# Altium PCB 00.main.PcbDoc (part 2 of 2)
Units mm, origin at the board's own origin, x right, y up, seen from the top; angles counter-clockwise.
Board outline 186 x 60 mm, 2 copper layers (Top Layer, Bottom Layer); 117 components, 80 nets, 547 pads, 161 vias.
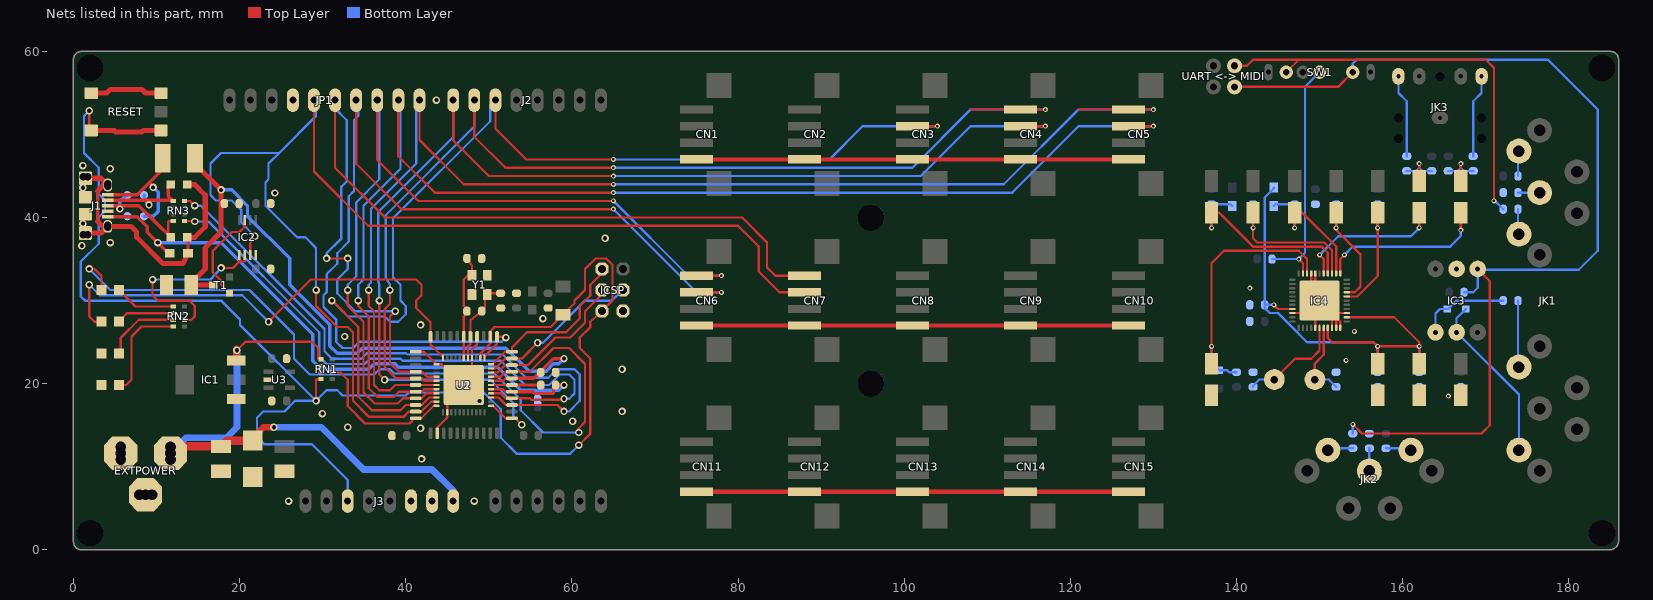
[diagram p2: the nets of this part, all layers, seen from the top]

## Via types
v1: diameter 0.9/0.9 (per signal layer), hole 0.5, Top Layer to Bottom Layer, 100 vias
v2: diameter 0.6, hole 0.3, Top Layer to Bottom Layer, 61 vias

## Nets (pads, with @x,y where several pads share a name; then routed paths per layer and width w, separated by ;. In a path a pad name is that pad's centre, name@x,y a point inside that pad or via, vN(x,y) a via of type N, cw(c..) or ccw(c..) an arc to the next point about the centre after c; other vN are vias at no path point) (continued)
D5*: CN3.2 J2.6 U1.31 U2.31 | length 128.3
  Top Layer w0.275: v1(31.115,30) 34.29,26.825 34.29,18.443 35.928,16.805 39.383,16.805 40.018,17.44 U2.31@41.19,17.44 41.923,17.44 42.823,18.34 U1.31@43.715,18.34 ; J2.6@50.8,54.13 50.8,50.7 54.5,47 v2(65,47) ; CN3.2@101,51 v2(104,51)
  Bottom Layer w0.275: v1(31.115,30) 33.02,28.095 37.465,28.095 38.1,27.46 39.116,27.46 40.005,28.349 40.005,29.365 39.37,30 39.37,31.905 38.481,32.794 38.481,39.906 50.165,51.59 50.165,53.495 J2.6@50.8,54.13 ; v2(65,47) 91,47 95,51 v2(104,51)
D6*: CN4.1 J2.7 U1.27 U2.27 | length 136.5
  Top Layer w0.275: v1(38.1,31.27) 38.1,29.619 37.465,28.984 37.465,21.999 38.824,20.64 U2.27@41.19,20.64 41.923,20.64 42.223,20.34 U1.27@43.715,20.34 ; J2.7@48.26,54.13 48.26,49.74 52,46 v2(65,46) ; CN4.1@114,53 108,53 v2(117,53)
  Bottom Layer w0.275: v1(38.1,31.27) 38.1,31.905 37.592,32.794 37.592,40.287 48.26,50.955 J2.7@48.26,54.13 ; v2(65,46) 101,46 108,53 v2(117,53)
D7: CN4.2 J2.8 U1.1 U2.1 | length 145.4
  Top Layer w0.275: v1(36.83,30) 36.83,21.11 v1(37.465,20.475) ; J2.8@45.72,54.13 45.72,49.28 50,45 v2(65,45) ; U1.1@50.265,17.34 50.506,17.34 52.006,15.84 U2.1@52.79,15.84 53.195,15.84 v1(53.975,15.06) ; CN4.2@114,51 v2(117,51)
  Bottom Layer w0.275: v1(36.83,30) 36.83,31.905 36.703,32.413 36.703,40.668 45.72,49.685 J2.8@45.72,54.13 ; v1(37.465,20.475) 50.165,20.475 52.959,17.681 52.959,16.076 v1(53.975,15.06) ; v2(65,45) 102,45 108,51 v2(117,51)
D+: D+.X J1.P3 RN3.8 Z1.1 | length 18
  Top Layer w0.275: Z1.1@11.7,37.62 11.43,37.985 11.43,39.525 11.5,39.595 RN3.8@12.025,39.595
  Top Layer w0.406: v1(5.6,41.03) v1@5.6,41.43 ; Z1.1@11.7,37.62 9.795,39.525 9.779,39.525 7.874,41.43 ; v1@5.6,41.43 J1.P3@4.14,41.43 v1@5.6,41.43 ; v1@5.6,41.43 7.874,41.43 ; v1@5.6,41.43 7.874,41.43
  Bottom Layer w0.406: v1(5.6,41.03) 5.6,41.93 6.37,42.7 D+.X@6.5,42.7
D-: D-.X J1.P2 RN3.5 Z2.1 | length 19.9
  Top Layer w0.275: Z2.1@11.43,43.605 Z2.1@11.7,43.97
  Top Layer w0.406: v1(9.1,41.53) 9.1,42.09 ; Z2.1@11.43,43.605 11.43,42.59 RN3.5@11.93,42.09 ; RN3.5@12.025,41.995 RN3.5@11.93,42.09 ; 9.1,42.09 RN3.5@11.93,42.09 ; 9.1,42.09 J1.P2@4.14,42.09 9.1,42.09 ; 9.1,42.09 RN3.5@11.93,42.09
  Bottom Layer w0.406: D-.X@8.509,42.7 8.509,42.121 v1(9.1,41.53)
"EXT MIDI IN": "UART <-> MIDI.1" IC3.4 R13.1 R17.1 SW1.3 | length 122.7
  Top Layer w0.275: 139.77,55.73 152.23,55.73 SW1.3@154,57.5 ; v2(154,15.111) 155.111,14 169.5,14 170.5,15 170.5,32.35 IC3.4@169.04,33.81
  Bottom Layer w0.275: R17.1@154,14 v2(154,15.111) ; SW1.3@154,57.5 154,58.5 154.5,59 177.5,59 183.5,53 183.5,36 181.21,33.71 169.14,33.71 IC3.4@169.04,33.81 169.04,31.54 168.5,31 R13.1@167.389,31
GATE_CMD: IC2.7 T1.3 | length 11.8
  Top Layer w0.275: T1.3@18.796,30.914 18.771,30.914 17.78,31.905 17.78,32.413 16.764,33.429 16.764,35.969 19.05,38.255 19.994,38.255 20.629,38.89 IC2.7@20.629,39.732
GND: C1.2 C2.2 C3.1 C4.2 C5.2 C8.- C9.1 C10.- C11.1 C12.- C13.2 C14.1 C22.1 C23.2 C24.1 C25.1 C38.2 C39.2 C40.2 C41.2 C42.2 C43.2 C44.2 C45.2 CN1.4 CN2.4 CN3.4 CN4.4 CN5.4 CN6.4 CN7.4 CN8.4 CN9.4 CN10.4 CN11.4 CN12.4 CN13.4 CN14.4 CN15.4 D1.A EXTPOWER.1 EXTPOWER.3 GND.X IC1.1 IC2.4 IC3.5 IC4.7 IC4.8 IC4.20 IC4.27 IC4.31 IC4.32 IC4.33 IC4.36 IC4.EXP ICSP.6 J1.S1 J1.S2 J1.S3 J1.S4 J1.S5 J1.S6 J3.6 J3.7 JP1.7 L2.2 L.C ON.C pad.MH1@1.702,44.935 pad.MH2@1.194,44.935 pad.MH3@1.702,37.925 pad.MH4@1.194,37.925 pad.MH5@4.14,44.046 pad.MH6@4.14,43.792 pad.MH7 pad.MH8 R2.2 R3.1 R4.1 R11.1 R16.1 R24.1 RESET.3 RESET.4 RN1.2 RN1.3 U1.15 U1.23 U1.35 U1.EXP U2.15 U2.23 U2.35 U2.P$1 U3.2 Y1.2 Y1.4 Z1.2 Z2.2 | length 245.9
  Top Layer w0.275: pad.MH8@4.064,39.017 J1.S4@4.14,38.941 ; U2.23@41.19,23.84 42.215,23.84 U1.23@43.715,22.34 ; 44.337,22.34 44.602,22.075 44.755,22.075 U1.EXP@46.99,19.84 ; U1.EXP@44.99,17.84 U1.EXP@46.99,19.84 ; U1.EXP@47.99,20.84 U1.EXP@46.99,19.84 ; v1(48.895,17.935) U1.EXP@46.99,19.84 ; IC4.20@146.725,28.5 IC4.EXP@148.5,28.5 ; IC4.8@149,33.275 149,31 IC4.EXP@149.5,30.5 ; IC4.27@149.5,26.725 149.5,29.5 IC4.EXP@150,30 ; IC4.7@149.5,33.275 IC4.EXP@149.5,30.5 ; IC4.31@151.5,26.725 IC4.EXP@151.5,28.5 ; IC4.32@152,26.725 IC4.EXP@152,28 ; IC4.33@152.5,26.725 152.5,27.5 IC4.EXP@152,28 ; IC4.36@153.275,28.5 IC4.EXP@151.5,28.5 ; IC4.EXP@149.5,30.5 IC4.EXP@150,30 ; IC4.EXP@150,30 IC4.EXP@151.5,28.5 ; IC4.EXP@151.5,28.5 IC4.EXP@152,28
  Top Layer w0.279: U1.23@43.715,22.34 44.337,22.34 ; U2.35@43.79,14.04 43.79,14.735 44.99,15.935 U1.EXP@44.99,17.84 ; U1.EXP@47.99,20.84 47.99,24.117 48.59,24.717 U2.15@48.59,25.64
  Top Layer w0.406: 2.921,39.525 2.921,43.208 ; Z1.2@13.7,37.62 13.8,37.52 L2.2@13.8,35.715
  Top Layer w0.508: CN11.4@75,7 CN12.4@88,7 CN13.4@101,7 CN14.4@114,7 CN15.4@127,7 ; CN6.4@75,27 CN9.4@114,27 CN10.4@127,27 ; CN1.4@75,47 CN2.4@88,47 CN3.4@101,47 CN4.4@114,47 CN5.4@127,47
  Top Layer w0.61: J1.S2@1.448,38.128 3.327,38.128 J1.S4@4.14,38.941 6.934,38.941 7.62,38.255 7.62,37.62 10.795,34.445 13.165,34.445 L2.2@13.8,35.715 ; J1.S1@1.448,44.732 3.327,44.732 J1.S3@4.14,43.919 3.632,43.919 2.921,43.208 ; RESET.4@2.15,54.983 4.028,54.983 4.445,55.4 8.255,55.4 8.672,54.983 RESET.3@10.55,54.983 ; 2.921,39.525 3.429,39.017 pad.MH8@4.064,39.017 ; Z1.2@13.7,37.62 14.605,37.62 15.875,38.89 15.875,42.7 14.605,43.97 Z2.2@13.7,43.97
  other v1: 25.908,5.87 48.26,5.87 41.91,10.95 41.783,14.633 33.02,14.76 60.096,15.471 29.972,16.411 66.04,16.665 66.04,21.745 32.639,25.682 41.783,27.079 56.515,27.841 1.016,36.604 4.445,36.985 64,37.5 1.143,39.271 24.257,42.954 1.143,43.589 4.445,45.875 1.143,46.256 43.688,54.13
  other v2: 165.5,18.5 153.2,22.8 154.2,26.3 141.611,31.5
HWB: RN1.6 U1.33 U2.33 | length 17.8
  Top Layer w0.275: RN1.6@31.155,21.345 32.15,21.345 33.02,20.475 33.02,17.3 35.115,15.205 40.45,15.205 41.085,15.84 U2.33@41.19,15.84 41.872,15.84 43.372,17.34 U1.33@43.715,17.34
"INT MIDI OUT": "UART <-> MIDI.3" R10.1 SW1.1 | length 51.6
  Top Layer w0.275: 139.77,58.27 141.27,58.27 142,59 147.5,59 ; SW1.1@146,57.5 147.5,59 ; v2(171,42) 171,58 170,59 147.5,59
  Bottom Layer w0.275: v2(171,42) 171.111,42 R10.1@172.111,41
IO8: CN5.1 JP1.1 U1.28 U2.28 | length 159.2
  Top Layer w0.275: v1(35.56,31.27) 35.56,29.365 36.195,28.73 36.195,19.84 36.83,19.205 38.1,19.205 38.735,19.84 U2.28@41.19,19.84 U1.28@43.715,19.84 ; JP1.1@41.656,54.13 41.656,49.344 47,44 v2(65,44) ; CN5.1@127,53 121,53 v2(130,53)
  Bottom Layer w0.275: v1(35.56,31.27) 35.56,31.905 35.814,32.159 35.814,41.049 41.275,46.51 41.275,53.749 JP1.1@41.656,54.13 ; v2(65,44) 112,44 121,53 v2(130,53)
IO9*: CN5.2 JP1.2 U1.29 U2.29 | length 152.1
  Top Layer w0.275: v1(34.29,30) 34.29,29.365 35.56,28.095 35.56,19.459 36.614,18.405 38.57,18.405 39.205,19.04 U2.29@41.19,19.04 41.923,19.04 42.223,19.34 U1.29@43.715,19.34 ; JP1.2@39.116,54.13 39.116,47.384 43.5,43 v2(65,43) ; CN5.2@127,51 v2(130,51)
  Bottom Layer w0.275: v1(34.29,30) 34.29,31.905 34.925,32.54 34.925,41.43 39.37,45.875 39.37,53.876 JP1.2@39.116,54.13 ; v2(65,43) 113,43 121,51 v2(130,51)
IO10*: CN6.1 JP1.3 U1.30 U2.30 | length 105.6
  Top Layer w0.275: v1(33.02,31.27) 33.02,29.365 34.925,27.46 34.925,18.951 36.271,17.605 39.04,17.605 39.675,18.24 U2.30@41.19,18.24 41.91,18.24 42.51,18.84 U1.30@43.715,18.84 ; JP1.3@36.576,54.13 36.576,46.924 41.5,42 v2(65,42) ; CN6.1@75,33 v2(78,33)
  Bottom Layer w0.275: v1(33.02,31.27) 33.02,31.905 34.036,32.921 34.036,41.811 36.83,44.605 JP1.3@36.83,52.86 ; JP1.3@36.576,54.13 JP1.3@36.576,53.495 ; v2(65,42) 74,33 v2(78,33) ; JP1.3@36.576,53.495 36.576,53.114 JP1.3@36.83,52.86 ; JP1.3@36.576,53.495 36.83,53.241 JP1.3@36.83,52.86
IO11*: CN6.2 JP1.4 U1.12 U2.12 | length 118.3
  Top Layer w0.275: JP1.4@34.036,54.13 34.036,46.464 39.5,41 v2(65,41) ; U1.12@49.49,23.115 49.49,23.28 50.99,24.78 U2.12@50.99,25.64 52.155,25.64 v1(52.07,25.555) ; CN6.2@75,31 v2(78,31)
  Bottom Layer w0.275: JP1.4@34.036,54.13 34.29,53.876 34.29,52.225 33.782,51.717 33.782,43.208 33.147,42.573 33.147,37.112 31.75,35.715 31.75,34.445 30.48,33.175 30.48,31.016 30.099,30.635 30.099,29.238 31.623,27.714 31.623,25.047 32.385,24.285 33.655,24.285 34.417,25.047 51.562,25.047 v1(52.07,25.555) ; v2(65,41) 75,31 v2(78,31)
IO12: CN7.1 JP1.5 U1.26 U2.26 | length 120.3
  Top Layer w0.275: v1(30.48,35.08) v1(33.02,35.08) ; JP1.5@31.496,54.13 31.496,46.004 37.5,40 80.5,40 83.5,37 83.5,34 84.5,33 CN7.1@88,33 ; v1(38.735,28.73) 38.1,28.095 38.1,22.507 39.167,21.44 U2.26@41.19,21.44 41.961,21.44 42.561,20.84 U1.26@43.715,20.84
  Bottom Layer w0.275: v1(30.48,35.08) 30.48,35.715 32.258,37.493 32.258,43.716 32.893,44.351 32.893,51.717 31.496,53.114 JP1.5@31.496,54.13 ; v1(33.02,35.08) 33.02,33.81 31.75,32.54 31.75,30.889 33.909,28.73 v1(38.735,28.73)
IO13*: CN7.2 IC2.3 JP1.6 U1.32 U2.32 | length 154.9
  Top Layer w0.275: IC2.3@21.279,35.507 21.279,37.055 v1(21.844,37.747) ; JP1.6@28.956,54.13 28.956,45.544 35.5,39 80,39 82.5,36.5 82.5,33.5 85,31 CN7.2@88,31 ; v1(29.21,31.27) 29.21,29.365 31.75,26.825 33.02,26.825 33.655,26.19 33.655,17.935 35.585,16.005 39.726,16.005 40.361,16.64 U2.32@41.19,16.64 41.885,16.64 43.085,17.84 U1.32@43.715,17.84
  Bottom Layer w0.275: v1(21.844,37.747) 20.193,39.398 20.193,40.922 19.05,42.065 17.145,42.065 16.51,42.7 16.51,46.51 17.78,47.78 24.765,47.78 ; JP1.6@28.956,54.13 29.21,53.876 29.21,52.225 24.765,47.78 ; v1(29.21,31.27) 29.21,36.35 27.94,37.62 26.924,37.62 23.114,41.43 23.114,44.224 23.495,44.605 23.495,46.51 24.765,47.78
LL: IC2.1 IC2.2 RN2.2 | length 23.8
  Top Layer w0.275: v1(9.525,32.54) 9.525,30.635 10.16,30 13.97,30 14.605,29.365 14.605,28.095 14.205,27.695 RN2.2@13.375,27.695 ; v1(17.78,33.937) 19.217,33.937 19.979,34.699 ; IC2.1@19.979,35.507 19.979,34.699 ; IC2.2@20.629,35.507 20.629,34.699 19.979,34.699
  Bottom Layer w0.275: v1(9.525,32.54) 16.51,32.54 v1(17.78,33.937)
MISO: ICSP.1 U1.11 U2.11 | length 20.4
  Top Layer w0.275: U1.11@50.265,22.34 50.455,22.34 51.968,23.853 U2.11@52.79,23.84 52.79,24.37 54.61,26.19 59.309,26.19 60.96,27.841 60.96,29.365 62.23,30.635 62.23,31.905 63.627,33.302 ICSP.1@63.627,33.81
MOSI: ICSP.4 U1.10 U2.10 | length 19.8
  Top Layer w0.275: U1.10@50.265,21.84 50.793,21.84 51.968,23.015 U2.10@52.79,23.04 54,23.04 v1(55.88,24.92)
  Bottom Layer w0.275: v1(55.88,24.92) 56.515,24.92 61.595,30 64.77,30 ICSP.4@66.167,31.27
NetC23_1: C23.1 D4.1 IC4.9 R19.1 | length 31.7
  Top Layer w0.275: C23.1@137,22.4 v2(137,24.5) 137,34.5 138.5,36 147.5,36 148.5,35 IC4.9@148.5,33.275
  Bottom Layer w0.275: v2(137,24.5) 137,22.625 D4.1@138,21.625 138.875,21.625 139.111,21.389 R19.1@140,21.389
NetC24_2: C24.2 IC4.29 Y2.2 | length 9.6
  Top Layer w0.275: Y2.2@149.44,20.5 149.44,22.44 150.5,23.5 IC4.29@150.5,26.725
  Bottom Layer w0.275: Y2.2@149.44,20.5 151.111,20.5 C24.2@152,19.611
NetC25_2: C25.2 IC4.28 Y2.1 | length 12.6
  Top Layer w0.275: Y2.1@144.56,20.5 147.06,23 149,23 150,24 IC4.28@150,26.725
  Bottom Layer w0.275: C25.2@142,19.611 142,19.75 142.75,20.5 Y2.1@144.56,20.5
NetC26_1: C26.1 IC4.1 | length 20.2
  Top Layer w0.275: IC4.1@152.5,33.275 152.5,35 v2(153,35.5) ; v2(167,38.5) C26.1@167,40.6
  Bottom Layer w0.275: v2(153,35.5) 154,36.5 165.731,36.5 167,37.769 v2(167,38.5)
NetC26_2: C26.2 R20.2 R21.1 | length 5.9
  Top Layer w0.275: C26.2@167,44.4 167,46 v2(167,46.5)
  Bottom Layer w0.275: R21.1@165.5,45.611 166.611,45.611 167,46 ; v2(167,46.5) 167,46 ; R20.2@168.5,45.611 167.389,45.611 167,46
NetC27_1: C27.1 IC4.5 | length 17.6
  Top Layer w0.275: v2(150,35.5) 150.5,35 IC4.5@150.5,33.275 ; v2(162,38.75) C27.1@162,40.6
  Bottom Layer w0.275: v2(150,35.5) 152.25,37.75 161,37.75 v2(162,38.75)
NetC27_2: C27.2 R22.2 R23.2 | length 5.9
  Top Layer w0.275: C27.2@162,44.4 v2(162,46.5)
  Bottom Layer w0.275: R23.2@160.5,45.611 161.611,45.611 162,46 ; v2(162,46.5) 162,46 ; R22.2@163.5,45.611 162.389,45.611 162,46
NetC28_1: C28.1 C29.1 IC4.40 | length 15.2
  Top Layer w0.275: IC4.40@153.275,30.5 154.534,30.5 157,32.966 v2(157,38.75) C28.1@157,40.6
  Bottom Layer w0.275: v2(157,38.75) C29.1@157,41.611
NetC30_1: C30.1 C31.1 IC4.3 | length 18.9
  Top Layer w0.275: C30.1@142,40.6 142,37.5 142.5,37 150.575,37 151.5,36.075 IC4.3@151.5,33.275
  Bottom Layer w0.275: v2(142,38.75) C31.1@142,41.611
NetC32_1: C32.1 C33.1 IC4.41 | length 14.9
  Top Layer w0.275: C32.1@152,40.6 152,38.5 154.94,35.56 154.94,31.69 154.25,31 IC4.41@153.275,31
  Bottom Layer w0.275: v2(152,38.75) C33.1@152,41.611
NetC34_1: C34.1 C35.1 IC4.4 L4.2 | length 25.8
  Top Layer w0.275: v2(137,38.75) 137,40 C34.1@137,40.6 137.9,40.6 142,36.5 150.25,36.5 151,35.75 IC4.4@151,33.275
  Bottom Layer w0.275: v2(137,38.75) C35.1@137,41.611 139.289,41.611 L4.2@139.5,41.4
NetC36_1: C36.1 C37.1 IC4.2 L3.2 | length 17.2
  Top Layer w0.275: v2(147,38.75) C36.1@147,40.6 147.9,40.6 152,36.5 IC4.2@152,33.275
  Bottom Layer w0.275: L3.2@144.5,41.4 144.711,41.611 C37.1@147,41.611 v2(147,38.75)
NetC39_1: C39.1 C40.1 C41.1 C42.1 C43.1 IC4.19 IC4.30 IC4.35 L3.1 | length 67.5
  Top Layer w0.275: v2(144.5,29.5) 145,29 IC4.19@146.725,29 ; IC4.30@151,26.725 151,25.5 151.5,25 156.5,25 v2(157,24.5) ; IC4.35@153.275,28 159,28 162,25 v2(162,24.5) ; C39.1@157,22.4 v2(157,24.5) ; C43.1@162,22.4 v2(162,24.5) ; v2(157,24.5) v2(162,24.5)
  Bottom Layer w0.275: v2(144.5,29.5) C41.1@143.389,29.5 ; L3.1@144.5,43.6 144.5,43.5 143.389,42.389 C41.1@143.389,29.5 ; C40.1@157,21.389 v2(157,24.5) 156.5,25 148.5,25 146.5,27 145,28.5 144,28.5 143.389,29.111 C41.1@143.389,29.5 ; C42.1@162,21.389 v2(162,24.5)
NetD3_1: D3.1 IC3.2 JK1.5' | length 20.6
  Bottom Layer w0.275: D3.1@167.625,29 166.5,27.875 IC3.2@166.5,26.19 174,18.69 JK1.5'@174,12
NetD3_2: D3.2 IC3.1 R14.2 | length 11.1
  Bottom Layer w0.275: IC3.1@163.96,26.19 163.96,28.46 164.5,29 D3.2@165.375,29 165.5,29 166.5,30 R14.2@172.111,30
NetIC4_10: IC4.10 R18.2 SW1.COM | length 28.7
  Top Layer w0.275: v2(147.5,35) 148,34.5 IC4.10@148,33.275
  Bottom Layer w0.275: R18.2@144.278,35 v2(147.5,35) 148.25,35.75 148.25,55.75 SW1.COM@150,57.5
NetJK1_2: JK1.2 R11.2 | length 2.6
  Bottom Layer w0.275: R11.2@173.889,43 JK1.2@176.5,43
NetJK1_4: JK1.4 R12.2 | length 3
  Bottom Layer w0.275: R12.2@173.889,45 173.889,47.889 JK1.4@174,48
NetJK1_4': JK1.4' R14.1 | length 7.9
  Bottom Layer w0.275: JK1.4'@173.889,22.111 R14.1@173.889,30
NetJK1_5: JK1.5 R10.2 | length 3
  Bottom Layer w0.275: R10.2@173.889,41 173.889,38.111 JK1.5@174,38
NetJK2_2: JK2.2 R16.2 | length 2.7
  Bottom Layer w0.275: JK2.2@156,9.5 R16.2@156,12.222
NetJK2_4: JK2.4 R15.2 | length 3.1
  Bottom Layer w0.275: R15.2@158,12.222 160.778,12.222 JK2.4@161,12
NetJK2_5: JK2.5 R17.2 | length 3.1
  Bottom Layer w0.275: JK2.5@151,12 151.222,12.222 R17.2@154,12.222
NetJK3_2: JK3.2 R23.1 | length 10
  Bottom Layer w0.275: JK3.2@159.5,57 159.5,55 160.5,54 R23.1@160.5,47.389
NetJK3_5: JK3.5 R20.1 | length 10
  Bottom Layer w0.275: R20.1@168.5,47.389 168.5,54 169.5,55 JK3.5@169.5,57
NetL_A: L.A RN2.7 | length 11.2
  Top Layer w0.275: L.A@5.495,23.65 L.A@5.715,23.65 ; RN2.7@12.025,27.695 7.855,27.695 5.715,25.555 ; L.A@5.715,23.65 5.715,25.555 ; L.A@5.715,23.65 5.715,25.555
NetON_A: ON.A RN2.8 | length 12.5
  Top Layer w0.275: ON.A@5.495,19.84 6.35,19.84 6.985,20.475 6.985,25.682 8.198,26.895 RN2.8@12.025,26.895
NetRN2_5: RN2.5 RX.A | length 7.3
  Top Layer w0.275: RX.A@5.495,31.27 7.47,29.295 RN2.5@12.025,29.295
NetRN2_6: RN2.6 TX.A | length 7
  Top Layer w0.275: TX.A@5.495,27.46 5.495,27.495 6.495,28.495 RN2.6@12.025,28.495
RD+: RN3.1 U1.4 U2.4 | length 70.5
  Top Layer w0.275: RN3.1@13.375,39.595 14.535,39.595 v1(14.605,39.525) ; U1.4@50.265,18.84 51.419,18.84 52.019,18.24 U2.4@52.79,18.24 54.94,18.24 55.118,18.062 58.928,18.062 58.979,18.113 v1(59.055,18.189)
  Bottom Layer w0.275: v1(14.605,39.525) 16.256,39.525 29.591,26.19 29.591,23.269 30.48,22.38 35.052,22.38 35.687,23.015 39.37,23.015 39.624,22.761 51.435,22.761 54.356,19.84 57.277,19.84 58.547,21.11 59.69,21.11 60.325,20.475 60.325,18.824 59.69,18.189 v1(59.055,18.189)
RD-: RN3.4 U1.3 U2.3 | length 74.2
  Top Layer w0.275: RN3.4@13.375,41.995 14.04,41.995 v1(14.605,41.43) ; U1.3@50.265,18.34 51.183,18.34 52.082,17.44 U2.3@52.79,17.44 58.28,17.44 v1(59.055,16.665)
  Bottom Layer w0.275: v1(14.605,41.43) 15.367,41.43 30.226,26.571 30.226,23.904 31.115,23.015 34.671,23.015 35.306,23.65 40.005,23.65 40.259,23.523 51.689,23.523 54.483,20.729 57.15,20.729 58.166,21.745 60.325,21.745 60.96,21.11 60.96,17.935 59.69,16.665 v1(59.055,16.665)
RESET: D2.A ICSP.5 J3.3 RESET.1 RESET.2 RN1.4 U1.13 U2.13 | length 185.3
  Top Layer w0.275: v1(1.905,52.86) 1.905,51.236 RESET.2@2.15,50.483 ; v1(29.21,17.935) 29.21,20.475 29.28,20.545 RN1.4@29.805,20.545 ; U1.13@48.99,23.115 48.99,23.643 50.19,24.843 U2.13@50.19,25.64 50.19,26.316 50.698,26.825 57.453,26.825 D2.A@58.928,28.3 60.325,29.697 60.325,30 61.595,31.27 61.595,33.81 62.865,35.08 64.135,35.08 64.897,34.318 64.897,30 ICSP.5@63.627,28.73 62.23,27.46 62.23,26.825 60.96,25.555 60.96,24.285 62.23,23.015 62.23,13.998 v1(60.833,12.601)
  Top Layer w0.61: RESET.2@2.15,50.483 4.917,50.483 5.08,50.32 8.255,50.32 8.418,50.483 RESET.1@10.55,50.483
  Bottom Layer w0.275: v1(1.905,52.86) 1.27,52.225 1.27,47.78 3.048,46.002 3.048,42.827 3.81,42.065 3.81,40.795 3.048,40.033 3.048,36.858 0.889,34.699 0.889,30.508 1.397,30 17.78,30 20.066,27.714 20.066,27.079 v1(29.21,17.935) ; J3.3@33.02,5.87 33.02,8.41 28.702,12.728 22.987,12.728 22.098,13.617 22.098,15.903 22.86,16.665 25.4,16.665 26.67,17.935 v1(29.21,17.935) ; v1(60.833,12.601) 59.817,11.585 53.34,11.585 51.435,13.49 51.435,16.919 49.403,18.951 40.386,18.951 40.005,18.57 32.385,18.57 31.75,19.205 30.48,19.205 v1(29.21,17.935)
RXLED: RX.C U1.8 U2.8 | length 95.7
  Top Layer w0.275: v1(1.905,33.81) 2.54,33.81 3.395,32.955 RX.C@3.395,31.27 ; U1.8@50.265,20.84 51.419,20.84 52.019,21.44 U2.8@52.79,21.44 54.94,21.44 57.785,24.285 59.69,24.285 61.595,22.38 61.595,15.395 60.833,14.633 v1(60.833,14.125)
  Bottom Layer w0.275: v1(1.905,33.81) 4.445,31.27 21.209,31.27 26.543,25.936 26.543,23.015 28.448,21.11 36.195,21.11 36.83,21.745 38.1,21.745 38.608,21.237 50.673,21.237 53.848,18.062 53.848,16.792 56.515,14.125 v1(60.833,14.125)
SCK: ICSP.3 U1.9 U2.9 | length 18.6
  Top Layer w0.275: U1.9@50.265,21.34 51.081,21.34 51.981,22.24 U2.9@52.79,22.24 54.724,22.24 58.039,25.555 59.817,25.555 61.595,27.333 61.595,28.73 63.627,30.762 ICSP.3@63.627,31.27
TXLED: TX.C U1.22 U2.22 | length 60.2
  Top Layer w0.275: v1(1.905,31.905) 1.905,28.095 2.54,27.46 TX.C@3.395,27.46 ; v1(23.495,27.46) 28.575,32.54 41.275,32.54 41.91,31.905 41.91,30.635 41.275,30 41.275,29.111 42.99,27.396 U2.22@42.99,25.64 ; U1.22@44.49,23.115 U1.22@44.49,23.229
  Top Layer w0.279: U2.22@42.99,25.64 42.99,24.729 44.045,23.674 44.19,23.529 U1.22@44.49,23.229
  Bottom Layer w0.275: v1(1.905,31.905) 3.175,30.635 20.32,30.635 v1(23.495,27.46)
UCAP: C7.1 U1.6 U2.6 | length 6
  Top Layer w0.275: U1.6@50.265,19.84 U2.6@52.79,19.84
  Top Layer w0.406: U2.6@52.79,19.84 C7.1@56.261,19.84
UGND: C7.2 J1.P5 L2.1 R3.2 U1.5 U2.5 | length 82.9
  Top Layer w0.275: U2.5@52.79,19.04 52.007,19.04 51.707,19.34 ; 51.707,19.34 U1.5@50.265,19.34 51.707,19.34
  Top Layer w0.406: J1.P5@4.14,40.109 7.671,40.109 8.89,38.89 8.89,38.255 v1(10.16,36.985) 11.43,35.715 L2.1@11.6,35.715 ; U2.5@52.79,19.04 55.283,19.04 55.499,18.824 57.785,18.824 57.785,19.825 C7.2@58.039,19.84 v1(59.055,19.84)
  Bottom Layer w0.406: v1(10.16,36.985) 17.78,36.985 28.829,25.936 28.829,22.761 29.845,21.745 35.56,21.745 36.195,22.38 38.735,22.38 39.116,21.999 51.054,21.999 53.848,19.205 55.616,19.205 R3.2@55.88,18.941 R3.2@55.88,19.205 ; v1(59.055,19.84) 58.42,19.205 ; R3.2@55.88,19.205 58.42,19.205 ; R3.2@55.88,19.205 58.42,19.205
USBID: J1.P4
VIN: C10.+ D1.C EXTPOWER.2 IC1.3 J3.8 RN1.1 | length 75
  Top Layer w0.275: v1(19.685,24.031) 20.701,25.047 28.702,25.047 29.464,24.285 29.464,23.015 29.534,22.945 RN1.1@29.805,22.945
  Top Layer w0.406: IC1.3@19.609,22.786 19.685,22.863 v1(19.685,24.031)
  Top Layer w0.813: v1(19.685,24.031) v1@19.609,24.209 ; D1.C@21.59,13.15 21.59,13.49 22.86,14.76 v1(24.13,14.76) ; v1@19.609,24.209 IC1.3@19.609,22.786 v1@19.609,24.209
  Top Layer w1.016: EXTPOWER.2@11.684,11.636 12.484,12.436 13.74,12.45 17.21,12.45 C10.+@17.78,12.45 18.48,13.15 D1.C@21.59,13.15
  Bottom Layer w0.813: EXTPOWER.2@11.684,11.636 13.538,13.49 18.415,13.49 19.685,14.76 v1(19.685,24.031) ; v1(24.13,14.76) 29.845,14.76 34.925,9.68 43.18,9.68 45.72,7.14 J3.8@45.72,5.87
VUSB: C8.+ C9.2 F1.1 R4.2 T1.1 U1.7 U2.7 | length 96.4
  Top Layer w0.275: U2.7@52.79,20.64 52.032,20.64 51.732,20.34 ; C9.2@56.261,21.364 C9.2@56.515,21.125 ; 51.732,20.34 U1.7@50.265,20.34 51.732,20.34
  Top Layer w0.406: R4.2@17.78,41.684 R4.2@18.161,41.684 ; U2.7@52.79,20.64 55.41,20.64 ; C9.2@56.261,21.364 C9.2@56.515,21.745 ; v1(59.055,23.015) 57.785,23.015 C9.2@56.515,21.745 ; 55.41,20.64 C9.2@56.515,21.745 ; 55.41,20.64 C9.2@56.515,21.745 ; C9.2@56.515,21.745 56.515,21.125 C9.2@56.515,21.745
  Top Layer w0.61: F1.1@14.65,47.145 15.285,45.83 v1(17.78,43.335) ; T1.1@16.764,31.88 14.861,31.88 C8.+@14.2,31.905 14.835,32.77 15.875,33.81 15.875,36.35 17.78,38.255 ; 17.78,38.255 R4.2@17.78,41.684 ; 17.78,38.255 R4.2@17.78,41.684 ; R4.2@17.78,41.684 v1(17.78,43.335) ; R4.2@17.78,41.684 v1(17.78,43.335)
  Bottom Layer w0.406: v1(17.78,43.335) 19.05,43.335 20.955,41.43 20.955,40.16 26.035,35.08 26.035,31.905 30.861,27.079 30.861,24.539 31.75,23.65 34.163,23.65 34.798,24.285 52.07,24.285 54.864,21.491 56.896,21.491 57.785,22.38 58.42,22.38 v1(59.055,23.015)
XTAL1: C4.1 R1.1 U1.17 U2.17 Y1.1 | length 14.3
  Top Layer w0.275: U1.17@46.99,23.115 U2.17@46.99,25.64 46.99,28.08 R1.1@47.371,28.73 R1.1@47.625,28.73 ; C4.1@47.371,35.08 47.97,34.17 Y1.1@47.97,33.055 47.505,33.055 46.99,32.54 46.99,29.365 ; 46.99,29.365 R1.1@47.625,28.73 ; 46.99,29.365 R1.1@47.625,28.73
XTAL2: C3.2 R1.2 U1.16 U2.16 Y1.3 | length 12
  Top Layer w0.275: U1.16@47.49,23.115 47.49,24.48 47.79,24.78 U2.16@47.79,25.64 47.79,27.61 R1.2@49.149,28.73 49.545,29.126 49.545,30.48 Y1.3@49.82,30.755 Y1.3@49.82,30.889 ; Y1.3@49.82,30.889 C3.2@51.435,30.889 Y1.3@49.82,30.889
XUSB: F1.2 J1.P1 VUSB.X | length 15.1
  Top Layer w0.406: J1.P1@4.14,42.751 7.671,42.751 9.125,44.205 ; v1(9.6,43.63) 9.5,43.73 9.5,43.83 9.125,44.205 ; F1.2@10.795,45.875 9.125,44.205
  Top Layer w0.61: F1.2@10.75,47.145 10.795,46.555 F1.2@10.795,45.875
  Bottom Layer w0.406: VUSB.X@8.509,40.16 9.63,40.16 10.2,40.73 10.2,43.03 v1(9.6,43.63)
pads on no net: CN1. CN2. CN3. CN4. CN5. CN6. CN7. CN8. CN9. CN10. CN11. CN12. CN13. CN14. CN15. IC3.3 IC4.11 IC4.12 IC4.13 IC4.14 IC4.15 IC4.16 IC4.17 IC4.18 IC4.22 IC4.23 IC4.24 IC4.25 IC4.26 IC4.38 IC4.39 J3.1 JK1.1 JK1.1' JK1.2' JK1.3 JK1.3' JK1.G JK2.1 JK2.3 JK2.G JK3.0 JK3.3 JK3.4 RESET.5 RN3.2 RN3.3 RN3.6 RN3.7 SW1.0 SW1.2 U3.4

## Polygon pours and split planes (outlines as drawn)
GND on Top Layer "Top Layer-No Net" (solid, remove dead copper, pour order 18): 0,60 186,60 186,0 0,0 0,60
AGND_SAM2195 on Top Layer "Top Layer-No Net" (solid, remove dead copper, pour order 6): 134,60 134,42 171,42 171,60 134,60
+5V on Top Layer "Polygon_1_Net_+5V" (solid, remove dead copper, pour order 0): 7.468,24.95 cw(c9.001,24.682) 9.269,26.215 15.51,26.215 cw(c15.51,24.428) 17.297,24.428 17.297,16.395 cw(c16.145,16.395) 16.145,15.243 9.902,15.243 cw(c9.573,17.347) 7.468,17.018
GND on Bottom Layer "Top Layer-No Net" (solid, remove dead copper, pour order 20): 0,60 186,60 186,0 0,0 0,60
AGND_SAM2195 on Bottom Layer "Top Layer-No Net" (solid, remove dead copper, pour order 4): 134,60 134,42 171,42 171,60 134,60
+5V on Bottom Layer "Polygon_2_Net_+5V" (solid, remove dead copper, pour order 1): 16.018,28.501 cw(c16.018,26.714) 17.805,26.714 17.805,17.012 cw(c16.336,17.347) 16,15.878 7.35,15.878 cw(c7.35,17.03) 6.198,17.03 6.198,27.349 cw(c7.35,27.349) 7.35,28.501

## Keep-outs
Keep-Out Layer:
  the board outline again, w0.254

## Silkscreen, mask and mechanical layers (free items; w line width, h text height)
Top Overlay:
  rectangle: 143.75,52.726 145.274,54.25
  rectangle: 145.24,50.691 146.764,52.215
  rectangle: 146.726,48.726 148.25,50.25
  lines w0.127: 145.24,48.691 148.288,48.691 148.288,50.215 146.764,50.215 ; 146.75,48.7 146.75,50.2 ; 145.24,50.215 146.764,50.215 ; 145.24,50.215 143.716,50.215 143.716,48.691 146.764,48.691 146.764,50.215 ; 145.24,50.215 146.764,50.215 ; 145.24,52.215 146.764,52.215 ; 145.24,52.215 143.716,52.215 143.716,50.691 146.764,50.691 146.764,52.215 ; 145.24,52.215 145.24,50.691 148.288,50.691 148.288,52.215 146.764,52.215 ; 145.24,52.215 146.764,52.215 ; 145.24,54.215 146.764,54.215 145.24,54.215 ; 145.24,54.215 145.24,52.691 148.288,52.691 148.288,54.215 145.25,54.215 145.25,52.691 143.716,52.691 143.716,54.215 145.24,54.215
  text "SCL" at 18.876,56 h1.52 r45
  text "SDA" at 21.416,56 h1.52 r45
  text "AREF" at 23.956,56 h1.52 r45
  text "GND" at 26.496,56 h1.52 r45
  text "D13 ~" at 29.036,56 h1.52 r45
  text "D12" at 31.576,56 h1.52 r45
  text "D11 ~" at 34.116,56 h1.52 r45
  text "D10 ~" at 36.656,56 h1.52 r45
  text "D9 ~" at 39.196,56 h1.52 r45
  text "D8" at 41.736,56 h1.52 r45
  text "D7" at 45.8,56 h1.52 r45
  text "D6 ~" at 48.34,56 h1.52 r45
  text "D5 ~" at 50.88,56 h1.52 r45
  text "D4" at 53.42,56 h1.52 r45
  text "D3 ~" at 55.96,56 h1.52 r45
  text "D2" at 58.5,56 h1.52 r45
  text "D1/TX" at 60.96,56 h1.52 r45
  text "D0/RX" at 63.5,56 h1.52 r45
  text "OUT" at 172.5,53.3 h3
  text "INT MIDI OUT" at 148.75,52.75 h1.65
  text "D0/RX" at 68,52.5 h1.52
  text "D2" at 83,52.5 h1.52
  text "D4" at 96,52.5 h1.52
  text "D6" at 109,52.5 h1.52
  text "D8" at 122,52.5 h1.52
  text "TX" at 133.25,50.75 h1.65
  text "OUT" at 139.5,50.75 h1.65
  text "OFF" at 148.75,50.75 h1.65
  text "D1/TX" at 68,50.5 h1.52
  text "D3" at 83,50.5 h1.52
  text "D5" at 96,50.5 h1.52
  text "D7" at 109,50.5 h1.52
  text "D9" at 122,50.5 h1.52
  text "→" at 135.75,50.25 h4
  text "AHG" at 51.75,49 h3
  text "RX" at 133.25,48.75 h1.65
  text "IN" at 140.25,48.75 h1.65
  text "EXT MIDI IN" at 148.75,48.75 h1.65
  text "VCC" at 69,48.5 h1.52
  text "VCC" at 82,48.5 h1.52
  text "VCC" at 95,48.5 h1.52
  text "VCC" at 108,48.5 h1.52
  text "VCC" at 121,48.5 h1.52
  text "←" at 135.75,48.25 h4
  text "GND" at 69,46.5 h1.52
  text "GND" at 82,46.5 h1.52
  text "GND" at 95,46.5 h1.52
  text "GND" at 108,46.5 h1.52
  text "GND" at 121,46.5 h1.52
  text "NTHU" at 25.75,45.75 h10
  text "RCMTH" at 49.75,45.55 h3
  text "Open-Source MIDI Platform" at 25.75,41.75 h3.17
  text "for Music Technology Education" at 32,38.5 h3.17
  text "D10" at 69.5,32.5 h1.52
  text "D12" at 82.5,32.5 h1.52
  text "A0" at 96,32.5 h1.52
  text "A2" at 109,32.5 h1.52
  text "A4" at 122,32.5 h1.52
  text "D11" at 69.5,30.5 h1.52
  text "D13" at 82.5,30.5 h1.52
  text "A1" at 96,30.5 h1.52
  text "A3" at 109,30.5 h1.52
  text "A5" at 122,30.5 h1.52
  text "VCC" at 69,28.5 h1.52
  text "VCC" at 82,28.5 h1.52
  text "VCC" at 95,28.5 h1.52
  text "VCC" at 108,28.5 h1.52
  text "VCC" at 121,28.5 h1.52
  text "GND" at 69,26.5 h1.52
  text "GND" at 82,26.5 h1.52
  text "GND" at 95,26.5 h1.52
  text "GND" at 108,26.5 h1.52
  text "GND" at 121,26.5 h1.52
  text "SCL" at 69,12.5 h1.52
  text "SCL" at 82,12.5 h1.52
  text "SCL" at 95,12.5 h1.52
  text "SCL" at 108,12.5 h1.52
  text "SCL" at 121,12.5 h1.52
  text "SDA" at 69,10.5 h1.52
  text "SDA" at 82,10.5 h1.52
  text "SDA" at 95,10.5 h1.52
  text "SDA" at 108,10.5 h1.52
  text "SDA" at 121,10.5 h1.52
  text "VCC" at 69,8.5 h1.52
  text "VCC" at 82,8.5 h1.52
  text "VCC" at 95,8.5 h1.52
  text "VCC" at 108,8.5 h1.52
  text "VCC" at 121,8.5 h1.52
  text "GND" at 69,6.5 h1.52
  text "GND" at 82,6.5 h1.52
  text "GND" at 95,6.5 h1.52
  text "GND" at 108,6.5 h1.52
  text "GND" at 121,6.5 h1.52
  text "IN" at 172.5,5.2 h3
  text "THRU" at 139.2,2.5 h3
  text "2025/5/1" at 12,2 h1.52
  text "A0" at 50.6,1.6 h1.52 r45
  text "A1" at 53.14,1.6 h1.52 r45
  text "A2" at 55.68,1.6 h1.52 r45
  text "A3" at 58.22,1.6 h1.52 r45
  text "A4" at 60.76,1.6 h1.52 r45
  text "A5" at 63.3,1.6 h1.52 r45
  text "NC" at 27.6,1.4 h1.52 r45
  text "IOREF" at 29.6,1.4 h1.27 r45
  text "RESET" at 32.2,1.4 h1.27 r45
  text "GND" at 40.2,1.4 h1.52 r45
  text "GND" at 42.74,1.4 h1.52 r45
  text "VIN" at 45.28,1.4 h1.52 r45
  text "+3V3" at 35,1.3 h1.52 r45
  text "+5V" at 37.7,1.3 h1.52 r45
Mechanical 3:
  drawing of 166 lines, arcs and shapes, not listed
  text "2.6mm x 4" at 7.5,62 h1.5
  text "2.5mm x 3" at 91.5,51.5 h1.5
  text "2.6mm x 3" at 101.5,47.5 h1.5
  text "2.7mm x 3" at 111.5,44 h1.5
  text "60 (mm)" at -2.086,25.15 h1.52 r90
  text "186 (mm)" at 87.515,-3.914 h1.52